# EAGLE board MOL-v2-1_MOD-Actuators (EAGLE 8.2.2)
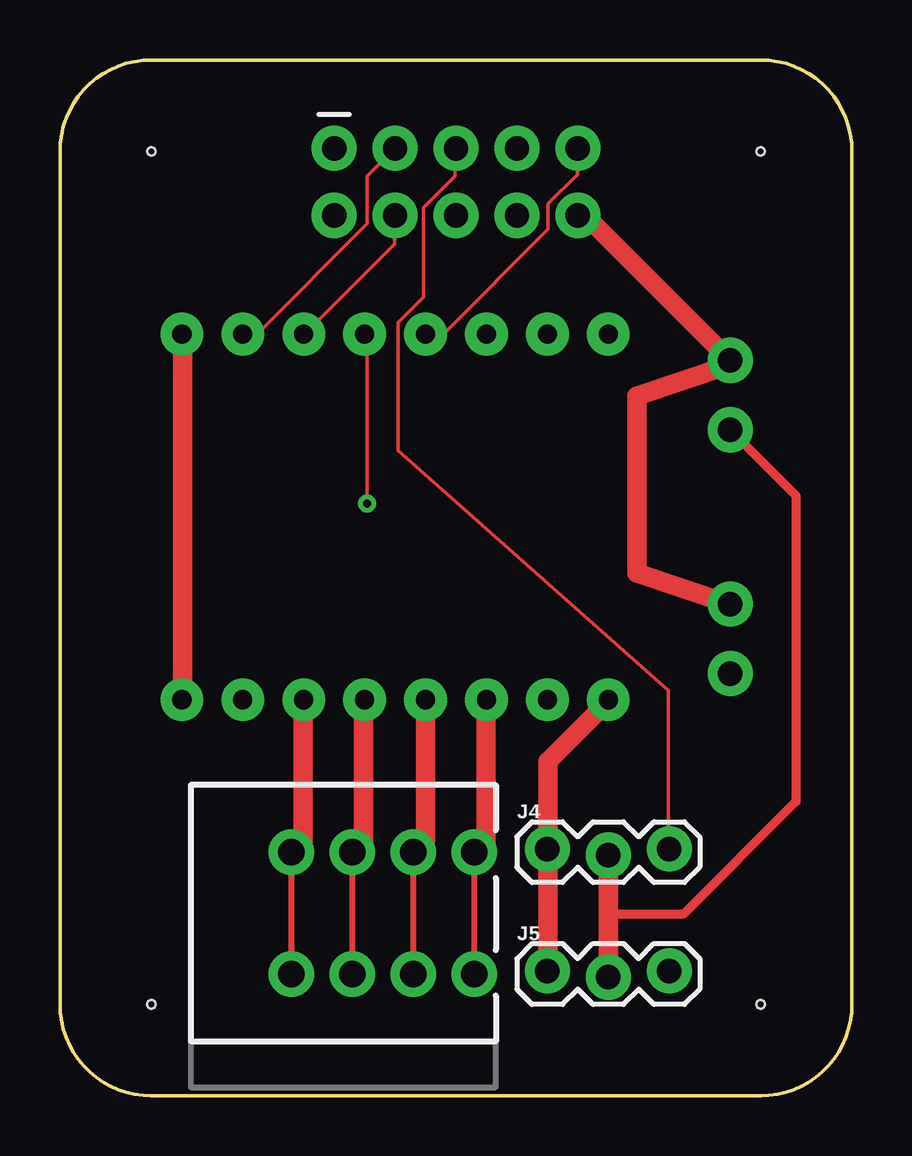
[diagram p0: board, top side]
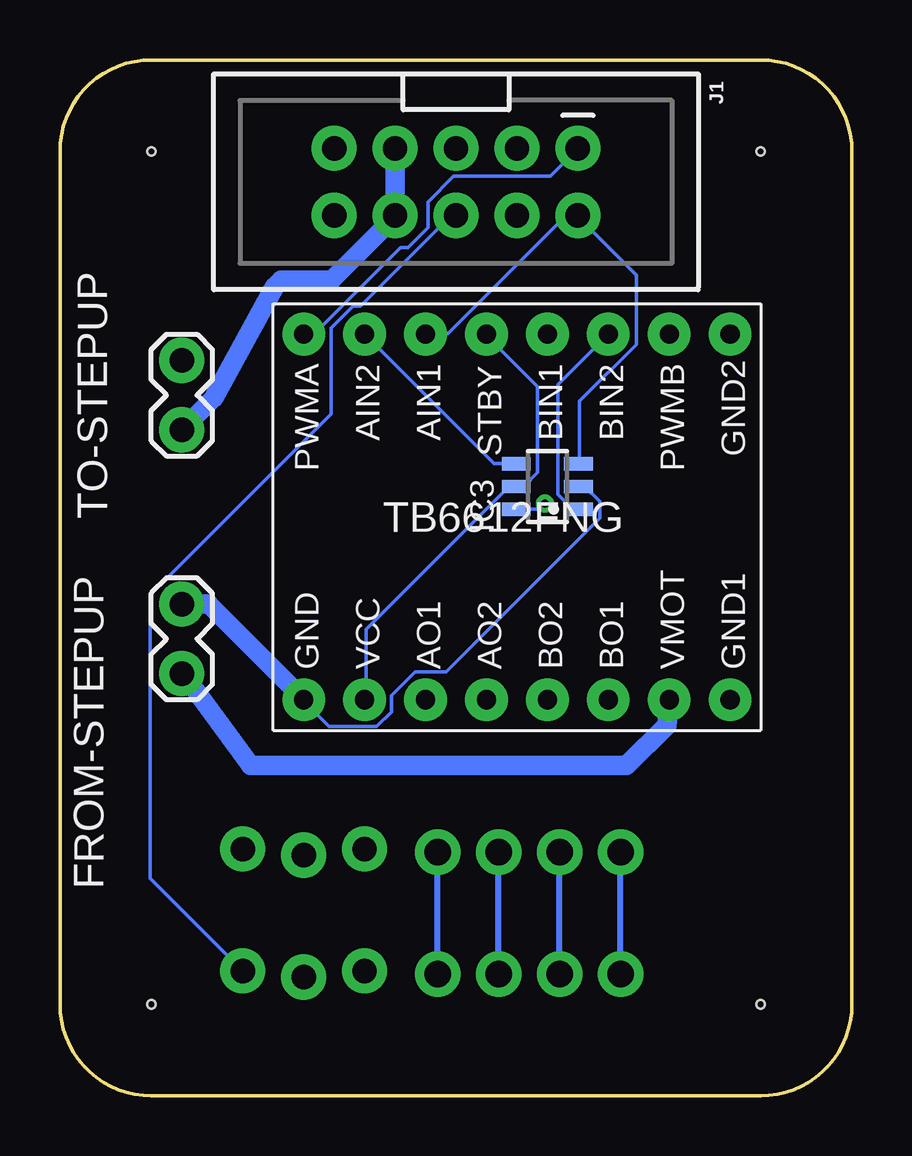
[diagram p1: board, bottom side, seen from below]

Size 33.02 x 43.18 mm. Coordinates in mm from the lower left corner, seen from the top.
Outline: 0,3.81 arc90 3.81,0 29.21,0 arc90 33.02,3.81 33.02,39.37 arc90 29.21,43.18 3.81,43.18 arc90 0,39.37 0,3.81
Copper layers (1*16): Top 0.035mm / dielectric 1.5mm / Bottom 0.035mm
Design rules "default": minimum track width 6mil, minimum drill 0.35mm, track to track 6mil, track to pad 6mil, pad to pad 6mil, via to via 6mil, smd to smd 6mil, copper to edge 40mil, drill to drill 6mil, minimum pad ring 10mil, minimum via ring 8mil, stop-mask expansion 4mil, vias tented up to drill 0mil, thermal gap 10mil
Net classes: 2 Power: width 0.381 mm, clearance 0.279 mm
Holes 0.35 mm at 3.81,39.37 29.21,39.37 29.21,3.81 3.81,3.81

## Footprints (pad centres in the part's own frame; a part is rotated, then mirrored left to right if it is on the bottom)
1X02_LOCK = drill 1.016 pad 1.88: 1 -0.178,0; 2 2.718,0
SOT23-6 = smd 0.55 x 1.2: 1 -0.95,-1.3; 2 0,-1.3; 3 0.95,-1.3; 4 0.95,1.3; 5 0,1.3; 6 -0.95,1.3
2X5-SHROUDED_LOCK = drill 1.016 pad 1.88: 1 -1.397,5.08; 2 1.397,5.08; 3 -1.397,2.54; 4 1.397,2.54; 5 -1.397,0; 6 1.397,0; 7 -1.397,-2.54; 8 1.397,-2.54; 9 -1.397,-5.08; 10 1.397,-5.08
1X03_LOCK@1 = drill 1.016 pad 1.88: 1 0,0.127; 2 2.54,-0.127; 3 5.08,0.127
SPRINGTERMINAL-2.54MM-4 = drill 1.1 pad 1.9: 1 7.62,-2.54; 2 5.08,-2.54; 3 2.54,-2.54; 4 0,-2.54; P$1 7.62,2.54; P$2 5.08,2.54; P$3 2.54,2.54; P$4 0,2.54
POLOLU_TB6612FNG = drill 0.8 pad 1.778: AIN1 7.62,3.81; AIN2 7.62,6.35; AO1 -7.62,3.81; AO2 -7.62,1.27; BIN1 7.62,-1.27; BIN2 7.62,-3.81; BO1 -7.62,-3.81; BO2 -7.62,-1.27; GND -7.62,8.89; GND1 -7.62,-8.89; GND2 7.62,-8.89; PWMA 7.62,8.89; PWMB 7.62,-6.35; STBY 7.62,1.27; VCC -7.62,6.35; VMOT -7.62,-6.35

## Placement (x,y rotation side)
FROM-STEPUP  [1X02_LOCK]  27.94,20.32 270 bottom
IC3  SN74LVC2G04DBV  [SOT23-6]  12.7,25.4 90 bottom
J1  ACTUATORS  [2X5-SHROUDED_LOCK]  16.51,38.1 270 bottom
J4  SERVO 1  [1X03_LOCK@1]  20.32,10.16 0 top
J5  SERVO 2  [1X03_LOCK@1]  20.32,5.08 0 top
MOTORS1  [SPRINGTERMINAL-2.54MM-4]  9.65,7.62 0 top
TO-STEPUP  [1X02_LOCK]  27.94,27.94 90 bottom
U$7  POLOLU_TB6612FNG  [POLOLU_TB6612FNG]  13.97,24.13 90 bottom

## Library data of the parts
FROM-STEPUP MOTORS1 U$7 = CMU-ArtFab
IC3 = 74LV
J1 = SparkFun-Connectors; PROD_ID: CONN-08671; SF_ID: PRT-08506
J4 J5 = SparkFun-Connectors
TO-STEPUP = CMU-ArtFab; GND: GND

## Nets
+3V3: IC3.5 J1.9 U$7.STBY U$7.VCC
+5V [Power]: J1.7 J1.8 J4.2 J5.2 TO-STEPUP.1
GND: FROM-STEPUP.1 IC3.2 J1.10 J4.1 J5.1 TO-STEPUP.2 U$7.GND
GND_MOT [Power]: U$7.GND1 U$7.GND2
M_AIN: IC3.3 J1.2 U$7.AIN1
M_BIN: IC3.1 J1.4 U$7.BIN2
M_PWMA: J1.1 U$7.PWMA
M_PWMB: J1.3 U$7.PWMB
N$1: MOTORS1.P$1 U$7.AO1
N$2: MOTORS1.P$2 U$7.AO2
N$3: MOTORS1.P$3 U$7.BO2
N$4: MOTORS1.P$4 U$7.BO1
N$5: IC3.6 U$7.BIN1
N$6: IC3.4 U$7.AIN2
S1: J1.5 J4.3
S2: J1.6 J5.3
VMOT [Power]: FROM-STEPUP.2 U$7.VMOT

## Tracks (layer width: path | path; a pad name or v marks a point on that pad's centre or on a via)
+3V3
  Top 0.152: J1.9 21.57,39.47 21.57,38.41 20.34,37.19 20.34,36.12 16,31.77 15.24,31.77 U$7.STBY
  Bottom 0.152: U$7.STBY 15.24,31.7 13.11,29.57 13.11,25.98 13.64,25.45 13.95,25.45 IC3.5 14.02,25.38 14.33,25.38 20.27,19.43 20.27,16.54 U$7.VCC
+5V
  Top 0.381: 22.86,7.57 25.98,7.57 30.68,12.27 30.68,25.02 TO-STEPUP.1
  Top 0.813: J4.2 22.86,7.57 J5.2
  Bottom 0.381: 19.05,36.65 J1.8
  Bottom 0.813: 19.05,36.65 21.69,34.01 23.8,34.01 24.08,33.73 26.62,29.08 TO-STEPUP.1 | J1.8 J1.7
GND
  Top 0.152: 21.95,36.65 21.64,36.65 J1.10 | 20.34,5.26 J5.1 | 20.34,10.29 J4.1 | 22.86,16.46 U$7.GND | 27.89,30.63 TO-STEPUP.2 | 27.89,20.5 FROM-STEPUP.1
  Top 0.813: TO-STEPUP.2 21.95,36.65 | 20.34,5.26 20.34,10.29 20.34,13.95 22.86,16.46 | 27.89,30.63 27.89,30.45 24.05,29.16 24.05,21.79 27.89,20.5
  Bottom 0.152: IC3.2 11.35,25.38 11.12,25.38 10.52,24.77 10.52,24.08 16.92,17.68 18.21,17.68 19.2,16.69 19.2,16 19.81,15.39 21.79,15.39 22.86,16.46 U$7.GND 22.86,16.54
  Bottom 0.813: FROM-STEPUP.1 26.82,20.5 22.86,16.54
GND_MOT
  Top 0.381: 5.11,16.54 U$7.GND1 | 5.11,31.7 U$7.GND2
  Top 0.813: 5.11,31.7 5.11,16.54
M_AIN
  Bottom 0.152: IC3.3 11.35,26.36 11.35,28.96 8.99,31.32 8.99,34.21 11.43,36.65 J1.2 11.43,36.58 12.04,36.58 16.84,31.77 17.75,31.77 U$7.AIN1
M_BIN
  Top 0.152: J1.4 13.95,36.65 13.95,35.51 10.21,31.77 U$7.BIN2
  Bottom 0.152: U$7.BIN2 12.27,29.64 12.27,25.07 11.66,24.46 11.43,24.46 IC3.1
M_PWMA
  Bottom 0.152: U$7.PWMA 22.86,31.77 22.4,31.77 18.82,35.36 18.52,35.36 17.68,36.2 17.68,37.26 16.61,38.33 12.57,38.33 11.43,39.47 J1.1
M_PWMB
  Top 0.152: J1.3 12.8,38.33 12.8,36.35 8.23,31.77 7.62,31.77 U$7.PWMB
N$1
  Top 0.152: 17.75,16.46 U$7.AO1 | 17.37,10.21 MOTORS1.P$1
  Top 0.813: 17.75,16.46 17.75,10.59 17.37,10.21
N$2
  Top 0.813: U$7.AO2 15.24,10.67 MOTORS1.P$2
N$3
  Top 0.152: 12.27,10.21 12.65,10.59 | 12.65,16.46 U$7.BO2
  Top 0.813: 12.65,10.59 12.65,16.46 | 12.27,10.21 MOTORS1.P$3
N$4
  Top 0.152: 10.13,16.46 U$7.BO1 | 9.75,10.21 MOTORS1.P$4
  Top 0.813: 10.13,16.46 10.13,10.59 9.75,10.21
N$5  (via drill 0.35)
  Top 0.152: v12.8,24.69 12.8,31.62 12.72,31.7 U$7.BIN1
  Bottom 0.152: v12.8,24.69 13.03,24.46 13.95,24.46 IC3.6
N$6
  Bottom 0.152: U$7.AIN2 14.94,26.36 14.02,26.36 IC3.4
S1
  Top 0.152: J1.5 16.46,39.47 16.46,38.33 15.16,37.03 15.16,33.3 14.1,32.23 14.1,26.9 25.38,16.89 25.38,10.29 J4.3
S2
  Bottom 0.152: J5.3 29.26,9.07 29.26,20.88 21.72,28.42 21.72,32 20.8,32.92 20.5,32.92 16.76,36.65 16.54,36.65 J1.6
VMOT
  Bottom 0.381: 7.62,16.46 U$7.VMOT | 27.89,17.6 FROM-STEPUP.2
  Bottom 0.813: 7.62,16.46 7.72,15.44 9.4,13.77 25.07,13.77 27.89,17.6